# EAGLE board LoraTester1 Mk1 Schematic v35 (EAGLE 9.7.0)
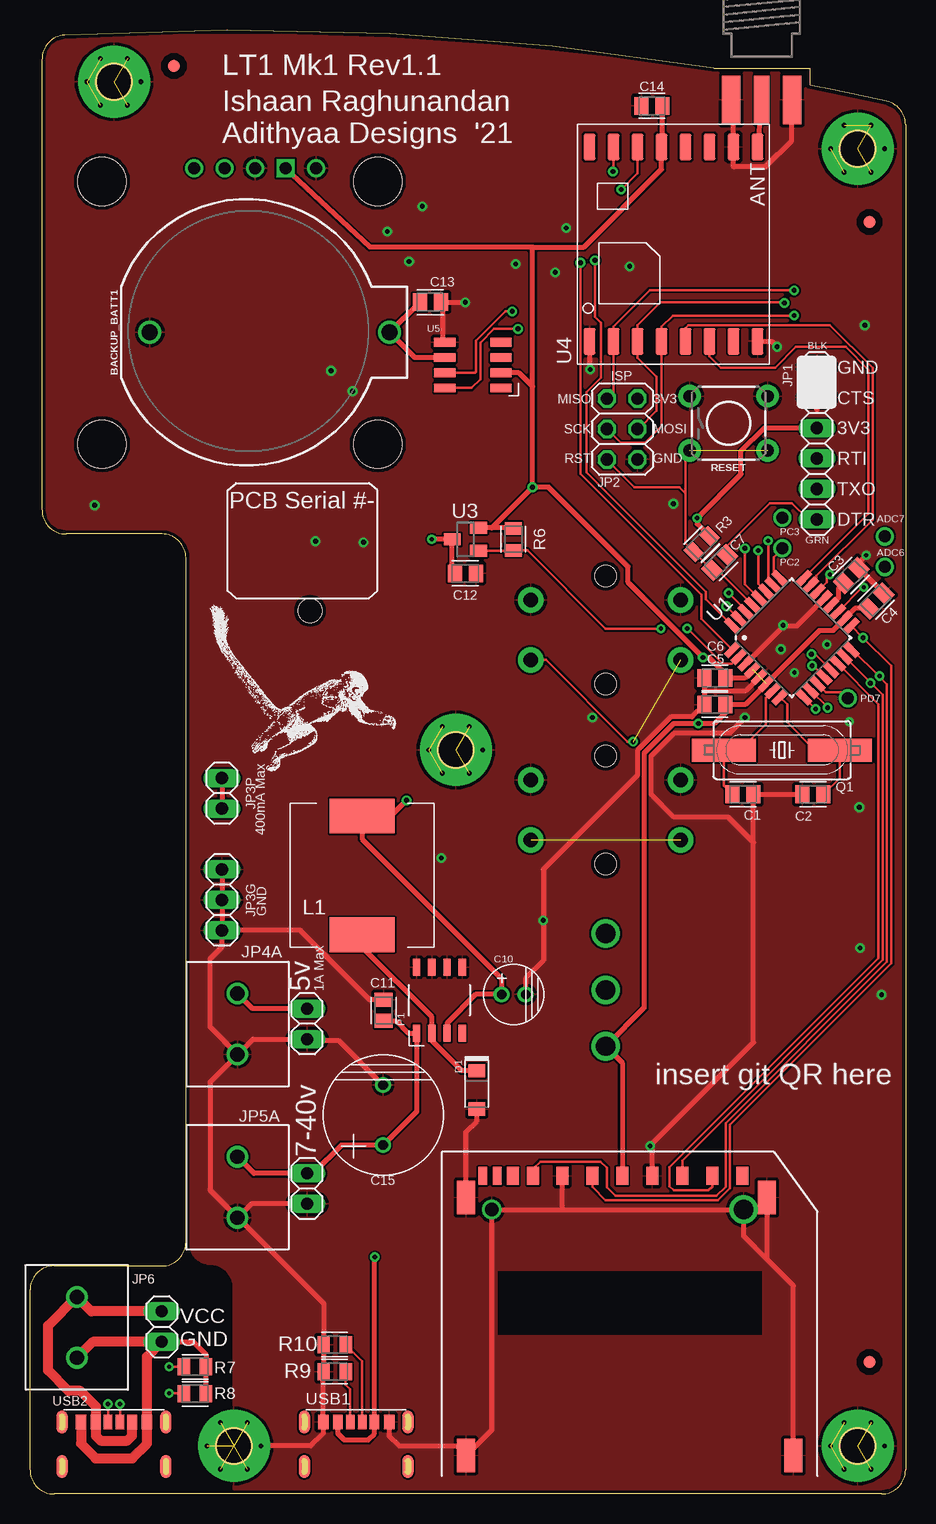
[diagram p0: board, top side]
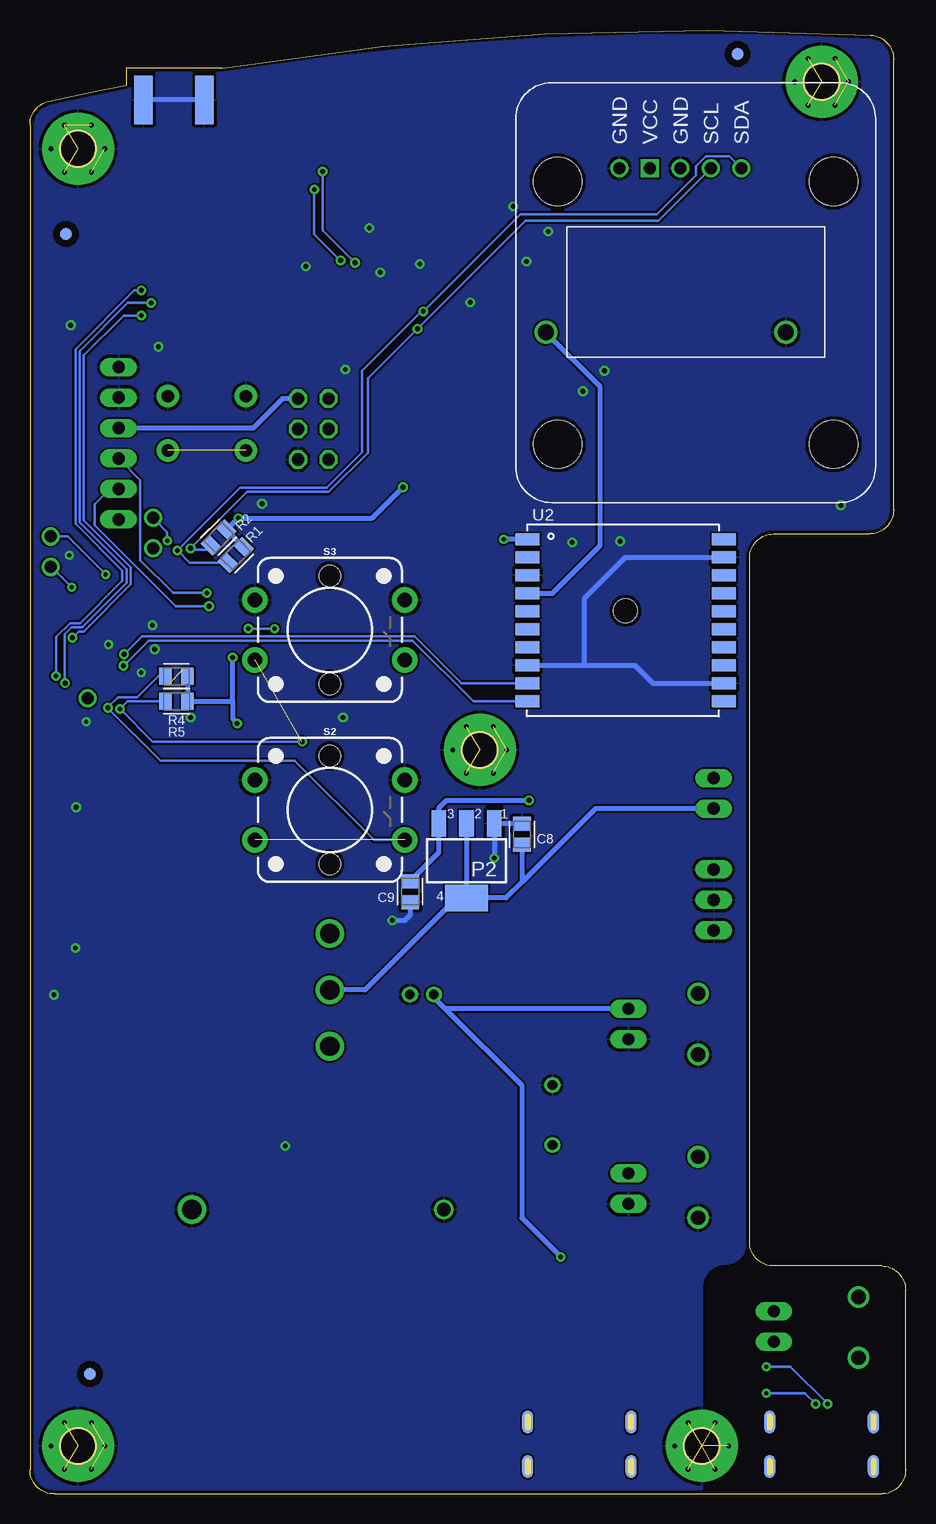
[diagram p1: board, bottom side, seen from below]

Size 73 x 122 mm. Coordinates in mm from the lower left corner, seen from the top.
Outline: 0,2 arc90 2,0 71,0 arc90 73,2 73,114.1 arc77 71.44,116.05 arc2 65,117.4 65,118.83 57,118.83 arc13 2.88,121.57 arc87 1,119.57 1,82 arc90 3,80 11,80 arc-90 13,78 13,21 arc-90 11,19 2,19 arc90 0,17 0,2
Outline: circle at 69,4 radius 1.5
Outline: circle at 17,4 radius 1.5
Outline: circle at 35.5,62 radius 1.5
Outline: circle at 69,112.1 radius 1.5
Outline: circle at 7,117.68 radius 1.5
Copper layers (1*16): Top 0.035mm / dielectric 1.5mm / Bottom 0.035mm
Design rules "PCBPower": minimum track width 6mil, minimum drill 0.35mm, track to track 6mil, track to pad 6mil, pad to pad 6mil, via to via 6mil, smd to smd 6mil, copper to edge 12mil, drill to drill 12mil, minimum pad ring 10mil, minimum via ring 8mil, stop-mask expansion 4mil, vias tented up to drill 0.4mm, thermal gap 10mil
Net classes: 1 Power: width 0.4 mm

## Footprints (pad centres in the part's own frame; a part is rotated, then mirrored left to right if it is on the bottom)
BREAKOUT_THT*1*1MM = drill 1: P$1 0,0
BATTCOM_20MM_PTH = drill 1.3: 1 11.85,0; 2 -8.15,0
CAPC2012X110 = smd 1.165 x 1.465: 1 -0.875,0; 2 0.875,0
CAP_2P_5X11 = drill 0.8: 1 -1,0; 2 1,0
CAP_5P_10X12.5 = drill 0.8: 1 -2.5,0; 2 2.5,0
SODFL3718X115 = smd 1.115 x 1.361: 1 -1.6,0; 2 1.6,0
FIDUCIAL_1MM = smd 1 x 1: 1 0,0
1X06 = drill 1.016 long: 1 -6.35,0; 2 -3.81,0; 3 -1.27,0; 4 1.27,0; 5 3.81,0; 6 6.35,0
2X03 = drill 1.016 octagon: 1 -2.54,-1.27; 2 -2.54,1.27; 3 0,-1.27; 4 0,1.27; 5 2.54,-1.27; 6 2.54,1.27
1X03 = drill 1.016 long: 1 -2.54,0; 2 0,0; 3 2.54,0
1X02 = drill 1.016 long: 1 -1.27,0; 2 1.27,0
TERMBLK_508-2N = drill 1.2: 1 0,0; 2 5.08,0
INDUCTOR_12X12MM = smd 5.4 x 2.9: P$1 0,4.95; P$2 0,-4.95
MOUNTING_HOLE_3MM = drill 3 pad 6: P1 0,0 | drill 0.4: P2 2.25,0; P3 1.125,-1.948; P4 1.125,1.948; P5 -1.124,-1.948; P6 -2.248,0; P7 -1.124,1.948
OLED_0.96_I2C = drill 1: P1 -1.27,4.87; P3 1.27,4.87; P4 3.81,4.87; P9 -6.35,4.87 | drill 1 square: P2 -3.81,4.87 | hole 4: 11.5,3.77; 11.5,-18.13; -11.5,3.77; -11.5,-18.13
XL1509_SOIC8 = smd 1.4 x 0.6: P1 -2.75,1.905; P2 -2.75,0.635; P3 -2.75,-0.635; P4 -2.75,-1.905; P5 2.75,-1.905; P6 2.75,-0.635; P7 2.75,0.635; P8 2.75,1.905
SOT223 = smd 1.219 x 2.235: 1 -2.311,-3.099; 2 0,-3.099; 3 2.311,-3.099 | smd 3.6 x 2.2: 4 0,3.099
HC49UP = smd 5.334 x 1.93: 1 -4.826,0; 2 4.826,0
RESC2012X65 = smd 1.031 x 1.42: 1 -0.919,0; 2 0.919,0
TACTILE_SWITCH_PTH_6.0MM = drill 1.016 pad 1.88: 1 -3.251,2.261; 2 3.251,2.261; 3 -3.251,-2.261; 4 3.251,-2.261
1P2T_SLIDE_SWITCH = drill 1.6: P1 0,4.7; P2 0,0; P3 0,-4.7
TACTILE_SWITCH_PTH_12MM = drill 1.2 pad 2.159: 1 6.25,-2.5; 2 -6.25,-2.5; 3 6.25,2.5; 4 -6.25,2.5 | hole 1.8: 0,4.5; 0,-4.5
SD_CARD_SOCKET-794212 = smd 0.7 x 1.5: CD -11.05,0; WP -12.25,0 | smd 1 x 1.5: P1 6.875,0; P2 4.375,0; P3 1.875,0; P4 -0.625,0; P5 -3.125,0; P6 -5.625,0; P7 -8.05,0; P8 -9.75,0; P9 9.375,0 | smd 1.5 x 2.8: P12 -13.65,-23.3; P15 11.45,-1.8; P16 -13.65,-1.8; P17 13.65,-23.3 | drill 1.6 pad 2: P13 9.5,-2.8 | drill 1.1 pad 1.5: P14 -11.5,-2.8
SMA_EDGELAUNCH = smd 4.064 x 1.524: GND@1 2.032,-2.54; GND@2 2.032,2.54 | smd 4.064 x 1.524 bottom: GND@3 2.032,2.54; GND@4 2.032,-2.54 | smd 4.064 x 1.27: P 2.032,0
QFP32_7X7_0.80 = smd 1.5 x 0.55: 1 -4.2,2.8; 2 -4.2,2; 3 -4.2,1.2; 4 -4.2,0.4; 5 -4.2,-0.4; 6 -4.2,-1.2; 7 -4.2,-2; 8 -4.2,-2.8; 17 4.2,-2.8; 18 4.2,-2; 19 4.2,-1.2; 20 4.2,-0.4; 21 4.2,0.4; 22 4.2,1.2; 23 4.2,2; 24 4.2,2.8 | smd 0.55 x 1.5: 9 -2.8,-4.2; 10 -2,-4.2; 11 -1.2,-4.2; 12 -0.4,-4.2; 13 0.4,-4.2; 14 1.2,-4.2; 15 2,-4.2; 16 2.8,-4.2; 25 2.8,4.2; 26 2,4.2; 27 1.2,4.2; 28 0.4,4.2; 29 -0.4,4.2; 30 -1.2,4.2; 31 -2,4.2; 32 -2.8,4.2
PA6H_GPS-MODULE_20PIN = smd 2 x 1: P1 -7.96,6.75; P2 -7.96,5.25; P3 -7.96,3.75; P4 -7.96,2.25; P5 -7.96,0.75; P6 -7.96,-0.75; P7 -7.96,-2.25; P8 -7.96,-3.75; P9 -7.96,-5.25; P10 -7.96,-6.75; P11 8.42,-6.75; P12 8.42,-5.25; P13 8.42,-3.75; P14 8.42,-2.25; P15 8.42,-0.75; P16 8.42,0.75; P17 8.42,2.25; P18 8.42,3.75; P19 8.42,5.25; P20 8.42,6.75 | hole 2: 0.2,0.8
SOT23 = smd 1 x 1.4: 1 -0.95,-1.1; 2 0.95,-1.1; 3 0,1.1
LORA_RFM95W-915S2_16MODULE = smd 2.2 x 1: P1 -8.1,7; P2 -8.1,5; P3 -8.1,3; P4 -8.1,1; P5 -8.1,-1; P6 -8.1,-3; P7 -8.1,-5; P8 -8.1,-7; P9 8.1,-7; P10 8.1,-5; P11 8.1,-3; P12 8.1,-1; P13 8.1,1; P14 8.1,3; P15 8.1,5; P16 8.1,7
DS3231MZ+_SOIC8 = smd 1.78 x 0.72: P1 -2.34,1.905; P2 -2.34,0.635; P3 -2.34,-0.635; P4 -2.34,-1.905; P5 2.34,-1.905; P6 2.34,-0.635; P7 2.34,0.635; P8 2.34,1.905
USB-C_POWER_SUN5463 = smd 0.7 x 1.2: CC1 -0.5,0; CC2 0.5,0 | smd 0.9 x 1.2: GND1 -2.75,0; GND2 2.75,0 | smd 0.9 x 1.9 bottom: P1 4.32,0; P2 4.32,-3.7; P3 -4.32,0; P4 -4.32,-3.7 | smd 0.9 x 1.9: P5 4.32,0; P6 4.32,-3.7; P7 -4.32,0; P8 -4.32,-3.7 | smd 0.8 x 1.2: VBUS1 -1.52,0; VBUS2 1.52,0

## Placement (x,y rotation side)
A1  [SQUIRREL_MONKE]  23.18,64.51 0 top
ADC6  BREAKOUT_PADBREAKOUT_THT  [BREAKOUT_THT*1*1MM]  71.28,77.25 45 top
ADC7  BREAKOUT_PADBREAKOUT_THT  [BREAKOUT_THT*1*1MM]  71.28,79.79 45 top
BACKUP_BATT1  [BATTCOM_20MM_PTH]  18.13,96.81 0 top
C1  33pF  [CAPC2012X110]  59.45,58.31 180 top
C2  33pF  [CAPC2012X110]  65.28,58.31 0 top
C3  0.1uF  [CAPC2012X110]  68.47,76.54 225 top
C4  0.1uF  [CAPC2012X110]  70.54,74.42 45 top
C5  0.1uF  [CAPC2012X110]  57.1,65.78 180 top
C6  4.7uF  [CAPC2012X110]  57.1,68 180 top
C7  0.1uF  [CAPC2012X110]  57.5,77.62 45 top
C8  10uF  [CAPC2012X110]  31.98,54.96 270 bottom
C9  10uF  [CAPC2012X110]  41.3,50.2 270 bottom
C10  100uF  [CAP_2P_5X11]  40.32,41.63 0 top
C11  1uF  [CAPC2012X110]  29.48,40.3 90 top
C12  1uF  [CAPC2012X110]  36.3,76.72 0 top
C13  1uF  [CAPC2012X110]  33.38,99.32 0 top
C14  0.1uF  [CAPC2012X110]  51.85,115.68 180 top
C15  470uF  [CAP_5P_10X12.5]  29.44,31.58 90 top
D1  [SODFL3718X115]  37.25,33.67 270 top
F1  FIDUCIAL  [FIDUCIAL_1MM]  12,119 0 top
F2  FIDUCIAL  [FIDUCIAL_1MM]  70,106 0 top
F3  FIDUCIAL  [FIDUCIAL_1MM]  70,11 0 top
F4  FIDUCIAL  [FIDUCIAL_1MM]  68,10 0 bottom
F5  FIDUCIAL  [FIDUCIAL_1MM]  14,120 0 bottom
F6  FIDUCIAL  [FIDUCIAL_1MM]  70,105 0 bottom
JP1  PINHD-1X6  [1X06]  65.62,87.56 90 top
JP2  PINHD-2X3  [2X03]  49.38,88.74 270 top
JP3G  PINHD-1X3  [1X03]  16,49.5 270 top
JP3P  PINHD-1X2  [1X02]  16,58.39 270 top
JP4  PINHD-1X2  [1X02]  23.1,39.17 270 top
JP4A  2828XX-2282837-2  [TERMBLK_508-2N]  17.3,41.7 270 top
JP5  PINHD-1X2  [1X02]  23.1,25.45 270 top
JP5A  2828XX-2282837-2  [TERMBLK_508-2N]  17.3,28.1 270 top
JP6  2828XX-2282837-2  [TERMBLK_508-2N]  3.9,11.35 90 top
JP6A  PINHD-1X2  [1X02]  10.98,13.95 90 top
L1  68uh  [INDUCTOR_12X12MM]  27.69,51.55 180 top
M1  MOUNTING_HOLES  [MOUNTING_HOLE_3MM]  17,4 0 top
M2  MOUNTING_HOLES  [MOUNTING_HOLE_3MM]  69,4 0 top
M3  MOUNTING_HOLES  [MOUNTING_HOLE_3MM]  35.5,62 0 top
M4  MOUNTING_HOLES  [MOUNTING_HOLE_3MM]  7,117.68 0 top
M5  MOUNTING_HOLES  [MOUNTING_HOLE_3MM]  69,112.1 0 top
OLED1  0.96_OLED_I2C  [OLED_0.96_I2C]  17.5,105.61 0 bottom
P1  XL1509  [XL1509_SOIC8]  34.14,41.15 90 top
P2  LDO-LM11173.3MP  [SOT223]  36.6,52.77 180 bottom
PC2  BREAKOUT_PADBREAKOUT_THT  [BREAKOUT_THT*1*1MM]  62.74,78.82 315 top
PC3  BREAKOUT_PADBREAKOUT_THT  [BREAKOUT_THT*1*1MM]  62.74,81.36 315 top
PD7  BREAKOUT_PADBREAKOUT_THT  [BREAKOUT_THT*1*1MM]  68.2,66.3 315 top
Q1  8mhz  [HC49UP]  62.7,61.99 180 top
R1  4.7k  [RESC2012X65]  55.84,78.26 225 bottom
R2  4.7k  [RESC2012X65]  57.27,79.71 225 bottom
R3  10k  [RESC2012X65]  56,79.16 225 top
R4  10k  [RESC2012X65]  60.79,68.15 180 bottom
R5  10k  [RESC2012X65]  60.78,66.06 180 bottom
R6  10k  [RESC2012X65]  40.3,79.55 270 top
R7  5.1k  [RESC2012X65]  13.76,10.59 0 top
R8  5.1k  [RESC2012X65]  13.76,8.34 0 top
R9  5.1k  [RESC2012X65]  25.4,10.19 0 top
R10  5.1k  [RESC2012X65]  25.4,12.44 0 top
RESET  MOMENTARY-SWITCH-SPST-PTH-6.0MM  [TACTILE_SWITCH_PTH_6.0MM]  58.25,89.22 0 top
S1  1P2T_SLIDE_SWITCH  [1P2T_SLIDE_SWITCH]  48,42 0 bottom
S2  MOMENTARY-SWITCH-SPST-PTH-12MM  [TACTILE_SWITCH_PTH_12MM]  48,57 0 bottom
S3  MOMENTARY-SWITCH-SPST-PTH-12MM  [TACTILE_SWITCH_PTH_12MM]  48,72 0 bottom
SD  SD_SOCKETSD_FULL  [SD_CARD_SOCKET-794212]  50,26.5 0 top
SMA  [SMA_EDGELAUNCH]  61,118.2 270 top
U1  ATMEGA328P-AU  [QFP32_7X7_0.80]  63.52,71.36 45 top
U2  PA6H_GPS  [PA6H_GPS-MODULE_20PIN]  23.55,72.8 0 bottom
U3  PMOSFET  [SOT23]  36.3,79.55 90 top
U4  LORA_RFM95W-915S2_MODULE  [LORA_RFM95W-915S2_16MODULE]  53.66,104.15 90 top
U5  DS3231MZ+  [DS3231MZ+_SOIC8]  36.93,94.07 180 top
USB1  USB-C_POWER_SUN5463  [USB-C_POWER_SUN5463]  27.2,6 0 top
USB2  USB-C_POWER_SUN5463  [USB-C_POWER_SUN5463]  7,6 0 top

## Library data of the parts
A1 ADC6 ADC7 F1-F6 M1-M5 OLED1 PC2 PC3 PD7 SMA USB1 USB2 = CDC Library
BACKUP_BATT1 = CDC Library; LINK: https://www.evelta.com/3v-litium-battery-holder/; PROD_ID: BATT-09031; SF_SKU: PRT-00783
C1 C2 = Capacitor; CATEGORY: Capacitor; LINK: https://www.evelta.com/33-pf-50v-0805-smd-multilayer-ceramic-capacitors-0805cg330j500nt-fenghua/
C3-C5 C7 C14 = Capacitor; CATEGORY: Capacitor; LINK: https://www.sunrom.com/p/100nf-104-smd-0805-pack-of-20
C6 = Capacitor; CATEGORY: Capacitor; LINK: https://www.evelta.com/4-7-uf-16v-0805-smd-multi-layer-ceramic-capacitor-0805x475k160ct-walsin/
C8 C9 = Capacitor; CATEGORY: Capacitor; LINK: https://www.sunrom.com/p/10uf-106-smd-0805-pack-of-10
C10 = CDC Library; LINK: https://www.evelta.com/100uf-25v-electrolytic-capacitor/
C11-C13 = Capacitor; CATEGORY: Capacitor; LINK: https://www.sunrom.com/p/1uf-105-smd-0805-pack-of-10
C15 = CDC Library; LINK: https://www.evelta.com/470uf-25v-electrolytic-capacitor/
D1 = CDC Library; LINK: https://www.sunrom.com/p/1n5819-b5819w-1n5819w-s4-sod123-1206-1a-40v-schottky-diode
JP1 JP2 JP3G JP3P JP4 JP5 JP6A = Connector; CATEGORY: CONNECTOR; SUB-CATEGORY: PIN-HEADER
JP4A JP5A JP6 = Connector; CATEGORY: Connector; DESCRIPTION: 2 Position Wire to Board Terminal Block Horizontal with Board 5.08 mm Through Hole; MANUFACTURER: TE Connectivity; MPN: 282837-2; OPERATING_TEMPERATURE: -40°C to +105°C; PART_STATUS: ACTIVE; ROHS_COMPLIANCE: RoHS Compliant; SERIES: 282837; SUBCATEGORY: Terminal Block; TYPE: Side Wire Entry
L1 = CDC Library; LINK: https://www.sunrom.com/p/68uh-680-12mm-inductor
P1 = CDC Library; LINK: https://www.sunrom.com/m/6161
P2 = CDC Library; LINK: https://www.sunrom.com/m/4004; MF: Texas Instruments; MPN: LM1117MP-3.3; OC_FARNELL: 9778195; OC_NEWARK: 28X3416
Q1 = CDC Library; LINK: https://www.evelta.com/hc-49smd-8mhz-20pf-20ppm-2pad-smd-smt-quartz-crystal/; OC_FARNELL: unknown; OC_NEWARK: unknown
R1 R2 = Resistor; CATEGORY: Resistor; LINK: https://www.sunrom.com/p/4k7-1-0805-pack-of-100; SUB-CATEGORY: Fixed
R3-R6 = Resistor; CATEGORY: Resistor; LINK: https://www.sunrom.com/p/10k-1-0805-pack-of-100; SUB-CATEGORY: Fixed
R7-R10 = Resistor; CATEGORY: Resistor; LINK: https://www.evelta.com/5k1-5-0805-smd-resistor-royal-ohm-0805W8J0512T5E/; SUB-CATEGORY: Fixed
RESET = CDC Library; LINK: https://www.sunrom.com/p/tactile-switch-6x6x43mm; PROD_ID: SWCH-08441; SF_SKU: COM-00097
S1 = CDC Library; LINK: https://www.sunrom.com/p/slide-switch-1p2t-high-current-straight
S2 S3 = CDC Library; LINK: https://www.sunrom.com/p/tactile-switch-square-head-omron-b3f-4055-12x12x73mm; PROD_ID: SWCH-09185; SF_SKU: COM-09190
SD = CDC Library; LINK: https://www.sunrom.com/p/full-sd-card-socket
U1 = CDC Library; LINK: https://www.evelta.com/atmega328p-au-ic-mcu-8bit-32kb-flash-32tqfp/
U2 = CDC Library; LINK: https://www.rhydolabz.com/wireless-gps-c-130_186/gps-smd-module-with-antennapa6h-p-1911.html
U3 = Transistor; CATEGORY: Transistor; LINK1: https://www.sunrom.com/p/ao3401-a19t-sot-23-p-ch-mosfet; SUB-CATEGORY: MOSFET; TYPE: P-Channel
U4 = CDC Library; LINK: https://www.digikey.in/product-detail/en/rf-solutions/RFM95W-915S2/RFM95W-915S2-ND/6564923
U5 = CDC Library; LINK: https://www.evelta.com/ds3231mz-maxim-integrated-alarm-rtc-i2c-2-3-v-to-5-5-v/

## Nets
3.3V_GPS [Power]: C12.1 U2.P1 U3.3
5V [Power]: C9.1 C10.1 JP4.1 JP4A.1 L1.P$2 P1.P3 P2.3 USB1.VBUS1 USB1.VBUS2
+3.3V [Power]: C4.1 C5.1 C6.1 C14.1 JP1.4 JP2.2 OLED1.P2 R1.1 R2.1 R3.1 R4.1 R5.1 R6.1 S1.P3 SD.P4 U1.4 U1.6 U1.18 U3.2 U4.P13 U5.P2
ADC6: ADC6.P$1 U1.19
ADC7: ADC7.P$1 U1.22
AMSVO [Power]: C8.2 JP3P.1 JP3P.2 P2.2 P2.4 S1.P2
AREF: C3.2 U1.20
CC1: R9.2 USB1.CC1
CC2: R10.2 USB1.CC2
CS_LR: U1.23 U4.P5
CS_SD: SD.P1 U1.14
DTR: C7.2 JP1.1
GND [Power]: BACKUP_BATT1.2 C1.1 C2.1 C3.1 C4.2 C5.2 C6.2 C8.1 C9.2 C10.2 C11.2 C12.2 C13.2 C14.2 C15.2 D1.2 JP1.5 JP1.6 JP2.6 JP3G.1 JP3G.2 JP3G.3 JP4.2 JP4A.2 JP5.2 JP5A.2 M1.P1 M1.P2 M1.P3 M1.P4 M1.P5 M1.P6 M1.P7 M2.P1 M2.P2 M2.P3 M2.P4 M2.P5 M2.P6 M2.P7 M3.P1 M3.P2 M3.P3 M3.P4 M3.P5 M3.P6 M3.P7 M4.P1 M4.P2 M4.P3 M4.P4 M4.P5 M4.P6 M4.P7 M5.P1 M5.P2 M5.P3 M5.P4 M5.P5 M5.P6 M5.P7 OLED1.P1 OLED1.P9 P1.P5 P1.P6 P1.P7 P1.P8 P2.1 R9.1 R10.1 RESET.1 RESET.2 S2.3 S2.4 S3.3 S3.4 SD.P3 SD.P6 SD.P12 SD.P13 SD.P14 SD.P15 SD.P16 SD.P17 SMA.GND@1 SMA.GND@2 SMA.GND@3 SMA.GND@4 U1.3 U1.5 U1.21 U2.P3 U2.P8 U2.P12 U2.P19 U4.P1 U4.P8 U4.P10 U5.P5 USB1.GND1 USB1.GND2
GPS_POWER: R6.2 U1.2 U3.1
INT0: U1.32 U4.P14
INT1: U1.1 U4.P15
MISO: JP2.1 SD.P7 U1.16 U4.P2
MOSI: JP2.4 SD.P2 U1.15 U4.P3
PC2: PC2.P$1 U1.25
PC3: PC3.P$1 U1.26
PD7: PD7.P$1 U1.11
Q1: C1.2 Q1.2 U1.7
Q2: C2.2 Q1.1 U1.8
RDX: JP1.3 U1.30
RESET_LR: U1.24 U4.P6
RST: C7.1 JP2.5 R3.2 RESET.3 RESET.4 U1.29
RTC_BATT [Power]: BACKUP_BATT1.1 C13.1 U2.P4 U5.P6
RX_GPS: U1.12 U2.P10
S_CC1: R7.1 USB2.CC1
S_CC2: R8.1 USB2.CC2
S_GND [Power]: JP6.1 JP6A.1 R7.2 R8.2 USB2.GND1 USB2.GND2
S_VCC [Power]: JP6.2 JP6A.2 USB2.VBUS1 USB2.VBUS2
SCK: JP2.3 SD.P5 U1.17 U4.P4
SCL: OLED1.P3 R2.2 U1.28 U5.P8
SDA: OLED1.P4 R1.2 U1.27 U5.P7
SMA-ANT [RF]: SMA.P U4.P9
SW2: R4.2 S2.1 S2.2 U1.10
SW3: R5.2 S3.1 S3.2 U1.9
TX_GPS: U1.13 U2.P9
TXD: JP1.2 U1.31
VIN [Power]: C11.1 C15.1 JP5.1 JP5A.1 P1.P1
XLVO [Power]: D1.1 L1.P$1 P1.P2

## Tracks (layer width: path | path; a pad name or v marks a point on that pad's centre or on a via)
3.3V_GPS  (via drill 0.35)
  Top 0.4: v33.5,79.55 U3.3 35.2,76.94 C12.1
  Bottom 0.4: U2.P1 v33.5,79.55
5V  (via drill 0.35, 0.4)
  Top 0.4: JP4.1 18.55,40.45 JP4A.1 | v31.4,57.8 30.1,56.5 L1.P$2 27.69,54.57 39.32,42.94 C10.1 37.16,41.63 34.78,39.25 P1.P3 | USB1.VBUS1 25.68,5.02 26.2,4.5 28.2,4.5 28.72,5.02 USB1.VBUS2 28.72,19.72 v28.75,19.75
  Bottom 0.4: JP4.1 38.41,40.45 | v31.4,57.8 38.28,57.8 38.91,57.17 P2.3 38.91,53.46 C9.1 | 38.41,40.45 32,34.04 32,23 v28.75,19.75 | 38.41,40.45 39.32,41.36 C10.1
+3.3V  (via drill 0.35, 0.4)  (1 unrouted)
  Top 0.4: U1.4 59.59,68 C6.1 57.98,68.36 56.64,69.7 v56.1,69.7 56.1,69.75 49.86,75.98 49.86,77.27 43.23,83.9 v41.9,83.9 | C14.1 52.73,112.31 U4.P13 52.66,110.39 46.17,103.9 41.9,103.9 | 56.75,79.81 R3.1 55.63,80.83 v55.63,81.33 59.28,84.98 59.28,86.92 61.19,88.83 JP1.4 | 69.95,73.77 C4.1 68.79,73.8 U1.18 66.94,71.95 65.81,71.95 U1.6 59.64,65.78 C5.1 57.98,65.12 57.06,64.2 53.65,64.2 51.2,61.75 51.2,40.5 S1.P3 49.38,35.92 SD.P4 | 41.9,103.9 28.35,103.9 21.86,109.94 OLED1.P2 | 41.9,92.3 40.77,93.44 U5.P2 | 41.9,92.3 41.9,103.9 | v41.9,83.9 41.9,92.3 | 38.5,80.5 U3.2 | v41.9,83.9 38.5,80.5 | R6.1 40.27,80.5 38.5,80.5
  Bottom 0.4: 56.1,66.1 v56.1,69.7 | 56.1,66.1 56.14,66.06 R5.1 R4.1 | 56.1,66.1 56.1,64.58 v55.72,64.2 | v41.9,83.9 44.47,81.33 v55.62,81.33 v55.63,81.33 56.6,80.36 R2.1 56.62,80.34 R1.1 | JP2.2 51.94,91.28 54.39,88.83 JP1.4
ADC6  (via drill 0.35)
  Top 0.2: U1.19 69.41,75.55 v69.53,75.55
  Bottom 0.2: v69.53,75.55 71.23,77.25 ADC6.P$1
ADC7  (via drill 0.35)
  Top 0.2: U1.22 66.45,75.99 66.45,76.4 v66.68,76.62
  Bottom 0.2: ADC7.P$1 69.84,79.79 v66.68,76.62
AMSVO
  Top 0.4: JP3P.1 JP3P.2
  Bottom 0.4: P2.4 33.3,49.67 31.98,50.99 | P2.4 37.4,49.67 45.07,42 S1.P2 | P2.2 P2.4 | JP3P.2 25.85,57.12 31.98,50.99 | C8.2 31.98,50.99
AREF
  Top 0.4: C3.2 67.4,75.47 67.4,74.67 U1.20
CC1
  Top 0.2: R9.2 26.32,9.09 26.7,8.71 USB1.CC1
CC2
  Top 0.2: USB1.CC2 27.7,11.06 R10.2
CS_LR
  Top 0.2: U1.23 65.57,76.24 65.57,76.52 70.25,81.2 70.25,93.85 66.7,97.4 54.91,97.4 54.66,97.15 U4.P5
CS_SD
  Top 0.2: U1.14 70.75,65.82 70.75,44.65 53.32,27.22 53.32,25.64 53.67,25.3 56.57,25.3 56.88,25.6 SD.P1
DTR
  Top 0.2: JP1.1 64.89,81.21 63.53,82.57 61.7,82.57 58.12,78.99 C7.2
GND  (via drill 0.35, 0.4)  (21 unrouted)
  Top 0.4: JP5.2 18.46,24.18 JP5A.2 | JP5A.2 17.34,23.02 24.48,15.88 R10.1 R9.1 24.45,10.16 USB1.GND1 24.45,5.04 23.41,4 M1.P2 | JP4A.2 18.59,37.91 JP4.2 23.2,37.8 25.71,37.8 C15.2 | JP4A.2 15,34.32 15,25.32 JP5A.2 | JP4A.2 15,38.92 15,44.6 16,45.6 JP3G.3 | JP3G.1 JP3G.2 JP3G.3 | SD.P16 36.35,30.17 37.25,31.07 D1.2 | 44.4,23.7 SD.P14 38.5,5.35 SD.P12 35.55,4 30.8,4 29.95,4.85 USB1.GND2 | 44.4,23.7 SD.P13 59.5,21.5 61.45,19.55 | SD.P17 63.65,17.35 61.45,19.55 | SD.P15 61.45,19.55 | SD.P6 44.38,23.73 44.4,23.7 | C11.2 28.32,41.17 22.54,46.96 JP3G.3 | SD.P3 51.88,28.82 v51.7,29 60.33,37.63 60.33,54.3 | C2.1 C1.1 60.33,54.3 | C6.2 56.23,66.9 | 56.23,66.9 C5.2 55.2,64.75 53.42,64.75 50.65,61.98 50.65,59.9 42.8,52.05 v42.8,47.8 42.8,44.45 41.32,42.97 C10.2 | U1.5 59.63,66.9 56.23,66.9 | C4.2 71.16,75.09 C3.1 69.09,77.6 v69.72,78.22 | JP1.6 65.62,90.34 | 34.47,95.97 34.45,95.98 34.45,99.12 C13.2 36.28,99.32 v36.3,99.3 | U1.3 59.74,69.23 62.85,72.35 63.94,72.35 U1.21 | 60.33,54.3 58.23,56.4 53.7,56.4 51.8,58.3 51.8,61.5 53.7,63.4 58.3,63.4 v59.6,64.7 | U4.P8 61.85,96.05 v62.3,95.6 | SMA.GND@4 58.66,115.97 U4.P10 58.66,110.64 58.7,110.6 61.33,110.6 63.5,112.77 63.5,116.13 SMA.GND@3 | U4.P1 46.66,93.74 v46.7,93.7
  Bottom 0.4: C8.1 34.25,55.84 P2.1 34.29,53.01 v34.3,53 | C9.2 41.3,48.22 41.72,47.8 v42.8,47.8 | U2.P19 23.35,78.05 26.8,74.6 26.8,69.05 | U2.P8 26.8,69.05 | 26.8,69.05 22.55,69.05 21.05,67.55 U2.P12 | SMA.GND@4 SMA.GND@3
  other vias: 62.8,72.4 62.6,70.4 46.9,64.7 43.8,101.8 44.7,105.5 50,102.3 69.6,97.4 31.6,102.7 29.8,105.2 32.7,107.3 26.9,91.9 25.1,93.6 27.8,79.3 23.8,79.4 5.4,82.4 40.5,102.5 71,41.6 69.2,45.5 66.45,70.79 63.74,68.45 68.31,64.35 69.15,57.22 53.64,82.52
  pour Bottom: 15,0 71,0 arc90 73,2 73,114 arc90 65,122 3.4,122 arc90 0.9,119.5 0.9,82 arc90 2.9,80 11,80 arc-90 13,78 13,2 arc90
  pour Top: 14.8,0 71.4,0 arc90 73.1,1.7 73.1,113.7 arc90 65.1,121.7 3.5,121.7 arc90 1,119.2 1,81.7 arc90 3,79.7 11.1,79.7 arc-90 13.1,77.7 13.1,1.7 arc90
GPS_POWER  (via drill 0.35, 0.4)
  Top 0.2: U1.2 58.52,69.19 57.79,69.19 54.86,72.11 v54.8,72.11 | U3.1 40.27,78.6 R6.2 41.46,78.63 47.98,72.11 v52.6,72.11
  Bottom 0.2: v54.8,72.11 v52.6,72.11
INT0  (via drill 0.4)
  Top 0.2: v49.3,108.7 v49.31,108.7 50.66,110.05 U4.P14 | v47.1,102.8 47.1,98.09 47.61,97.58 47.61,93.02 46.4,91.81 46.4,85.13 56.33,75.2 56.33,74.58 U1.32
  Bottom 0.2: v47.1,102.8 47.14,102.8 49.3,104.96 v49.3,108.7
INT1  (via drill 0.4)
  Top 0.2: U4.P15 48.66,110.26 v48.6,110.2 | v45.9,102.6 v45.91,102.59 45.91,85.03 55.98,74.95 55.98,72.95 U1.1
  Bottom 0.2: v48.6,110.2 48.6,105.3 v45.9,102.6
MISO  (via drill 0.4)
  Top 0.2: SD.P7 41.95,27.1 42.55,27.7 47.58,27.7 48.1,27.18 48.1,25.57 48.82,24.84 57.23,24.84 58,25.62 58,30.9 71.45,44.35 71.45,67.48 70.81,68.12 | U1.16 68.56,70.36 70.81,68.12 | v63.7,100.3 | v63.7,100.3 51.68,100.3 48.66,97.28 U4.P2 48.66,91.83 JP2.1 | 70.81,68.12 70.81,68.13 v70.84,68.16
  Bottom 0.2: v63.7,100.3 64.3,100.3 69.21,95.39 69.21,80.84 65.3,76.93 65.3,76.08 68.81,72.57 69.67,72.57 70.8,71.44 70.8,68.2 v70.84,68.16
MOSI  (via drill 0.4)
  Top 0.2: SD.P2 54.38,27.78 71.1,44.5 71.1,66.6 70.1,67.6 | U1.15 70.1,67.6 | v62.9,99.25 62.85,99.3 52.58,99.3 50.66,97.38 U4.P3 50.66,94.7 52.24,93.12 52.24,90.26 50.73,88.74 JP2.4 | v70.07,67.57 70.1,67.6 | v70.07,67.57
  Bottom 0.2: v62.9,99.25 64.85,99.25 68.86,95.24 68.86,80.99 64.94,77.08 64.94,75.94 68.66,72.22 69.52,72.22 70.11,71.63 70.11,67.61 v70.07,67.57
PC2
  Top 0.2: U1.25 62,76.83 62,78.08 PC2.P$1
PC3  (via drill 0.35)
  Top 0.2: U1.26 61.55,76.15 v61.55,79.43 v61.54,79.44
  Bottom 0.2: PC3.P$1 61.54,80.16 v61.54,79.44
PD7
  Top 0.2: U1.11 66.37,66.8 67.7,66.8 PD7.P$1
Q1
  Top 0.2: U1.7 61.35,66.36 61.35,64.16 59.18,61.99 Q1.2 57.87,59.01 C1.2
Q2
  Top 0.2: 67.5,61.99 65.44,61.99 63.12,64.31 63.12,65.81 U1.8 | 67.5,61.99 Q1.1 | C2.2 67.5,59.66 67.5,61.99
RDX  (via drill 0.4)
  Top 0.2: v58.24,75.08 59.7,73.63 U1.30
  Bottom 0.2: v58.24,75.08 61.07,75.08 63.8,77.81 63.8,84.47 JP1.3
RESET_LR
  Top 0.2: U4.P6 56.66,94.8 57.6,93.86 62.14,93.86 63.87,95.59 68.01,95.59 69.9,93.7 69.9,81.7 U1.24
RST  (1 unrouted)
  Top 0.2: 60.25,74.04 U1.29 57.3,77 C7.1 56.86,77 R3.2 54.65,79.21 54.65,83.38 | RESET.3 54.65,86.61 54.65,83.38 | JP2.5 50.41,83.9 54.13,83.9 54.65,83.38
RTC_BATT
  Top 0.4: U5.P6 32.09,94.7 BACKUP_BATT1.1 30,96.81 C13.1
  Bottom 0.4: U2.P4 29.45,75.05 25.5,79 25.5,92.3 29.98,96.78 BACKUP_BATT1.1
RX_GPS  (via drill 0.4)
  Top 0.2: U1.12 65.39,68.92 65.31,68.92 v65.21,69.01
  Bottom 0.2: v65.21,69.01 64.93,69.3 64.9,69.3 63.1,71.11 41.09,71.11 36.04,66.05 U2.P10
S_CC1  (via drill 0.35)
  Top 0.2: USB2.CC1 v6.5,7.5 | R7.1 v11.61,10.59 v11.6,10.6
  Bottom 0.2: v11.6,10.6 9.6,10.6 v6.5,7.5
S_CC2  (via drill 0.35)
  Top 0.2: USB2.CC2 v7.5,7.5 | v11.6,8.4 12.78,8.4 R8.1
  Bottom 0.2: v7.5,7.5 8.4,8.4 v11.6,8.4
S_GND
  Top 0.4: R8.2 R7.2 14.68,11.59 13.59,12.68 JP6A.1
  Top 0.813: JP6.1 5.23,12.68 JP6A.1 9.75,11.45 USB2.GND2 9.75,4.2 8.52,2.97 5.48,2.97 4.25,4.2 USB2.GND1
S_VCC
  Top 0.813: JP6A.2 5.11,15.22 JP6.2 1.5,14.03 1.5,10.3 3.21,8.59 4.19,8.59 5.48,7.31 USB2.VBUS1 5.48,4.84 5.88,4.44 8.12,4.44 8.52,4.84 USB2.VBUS2
SCK  (via drill 0.4)
  Top 0.2: SD.P5 46.88,25.6 47.98,24.49 57.37,24.49 58.35,25.47 58.35,30.76 71.8,44.21 71.8,69.01 v69.45,71.36 U1.17 | v63.7,98.2 53.61,98.2 52.66,97.25 U4.P4 52.66,88.98 51.26,87.59 49.26,87.59 JP2.3
  Bottom 0.2: v63.7,98.2 65.18,98.2 68.5,94.88 68.5,81.13 64.59,77.22 64.59,75.79 68.52,71.86 68.94,71.86 v69.45,71.36
SCL  (via drill 0.4)
  Top 0.2: U5.P8 36.81,92.17 37.55,92.91 37.55,95.94 38.7,97.09 v40.69,97.09 | U1.28 59.61,75.83 v59.61,78.8
  Top 0.4: U5.P8
  Bottom 0.2: OLED1.P3 20.61,106.1 31.68,106.1 v40.69,97.09 44.82,92.96 44.82,86.78 48.11,83.5 54.91,83.5 v59.61,78.8 59.51,78.7 58.27,78.7 R2.2
SDA  (via drill 0.4)
  Top 0.2: v40.2,98.55 39.66,98.55 37.2,96.09 37.2,93.53 37.11,93.44 U5.P7 | U1.27 60.71,75.86 v60.71,78.63
  Bottom 0.2: R1.2 59.69,77.61 v60.71,78.63 55.48,83.85 48.25,83.85 45.29,86.81 45.29,93.61 40.36,98.55 v40.2,98.55 32.11,106.64 20.75,106.64 17.5,109.89 17.5,110.64 16.65,111.49 14.7,111.49 OLED1.P4
SMA-ANT
  Top 0.4: SMA.P U4.P9
SW2  (via drill 0.4)  (1 unrouted)
  Top 0.2: U1.10 66.5,65.54 v66.5,65.52
  Bottom 0.2: S2.1 44.33,54.5 50.93,61.1 62.11,61.1 66.5,65.49 v66.5,65.52 66.5,65.55 65.64,66.41 64.05,66.41 62.31,68.15 R4.2
SW3  (via drill 0.4)  (1 unrouted)
  Top 0.2: v65.5,65.42 U1.9 | S3.1 43.03,69.5 49.83,62.7 v50.3,62.7
  Bottom 0.2: R5.2 64.86,66.06 v65.5,65.42 62.78,62.7 v50.3,62.7
TX_GPS  (via drill 0.4)
  Top 0.2: U1.13 65.48,69.96 65.17,69.96 v65.16,69.97
  Bottom 0.2: v65.16,69.97 65.14,69.97 63.65,71.46 52.96,71.46 40.95,71.46 37.04,67.55 U2.P9
TXD  (via drill 0.4)
  Top 0.2: U1.31 v58.06,73.98
  Bottom 0.2: JP1.2 66.31,83.75 67.59,82.47 67.59,80.72 60.85,73.98 v58.06,73.98
VIN
  Top 0.4: JP5A.1 18.68,26.72 JP5.1 23.6,26.72 25.96,29.08 C15.1 29.44,29.06 32.24,31.86 P1.P1 31.54,38.4 30.51,39.42 C11.1
XLVO
  Top 0.4: L1.P$1 27.69,45.57 33.51,39.76 P1.P2 33.51,37.77 36.01,35.27 D1.1
(copper drawn outside any net)
  shapes: Bottom area x1, Top area x2

## Text on the board
tPlace: LT1 Mk1 Rev1.1 | Ishaan Raghunandan / Adithyaa Designs '21 | ISP | MISO / SCK / RST | 3V3 / MOSI / GND | PCB Serial #- | 400mA Max | GND | 5v | 1A Max | insert git QR here | 7-40v | VCC / GND
tNames: BLK | GND / CTS / 3V3 / RTI / TXO / DTR | GRN